# Altium PCB RoomSensor.PcbDoc
Units mm, origin at the board's own origin, x right, y up, seen from the top; angles counter-clockwise.
Board outline 11.82 x 18.92 mm, 2 copper layers (Top Layer, Bottom Layer); 9 components, 6 nets, 52 pads, 29 vias.
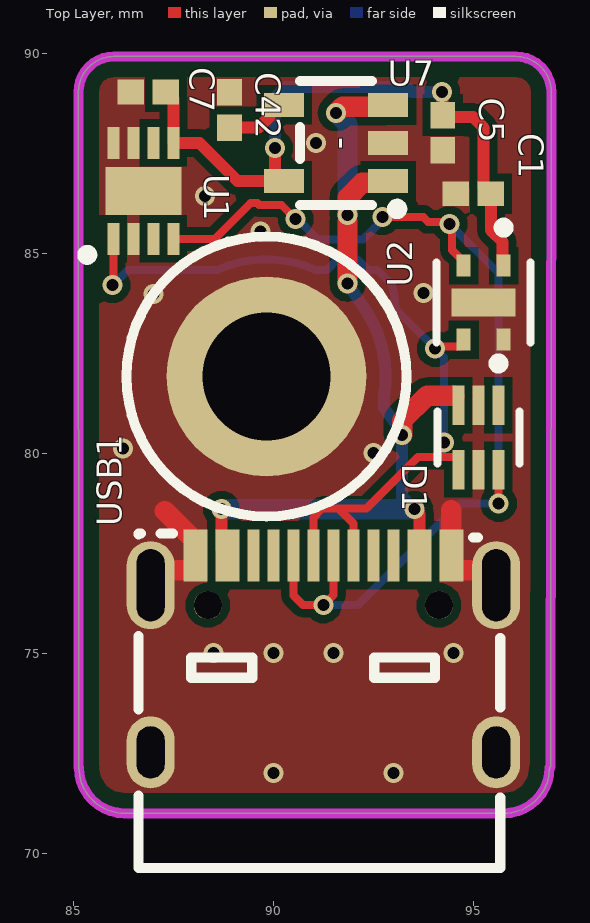
[diagram p0: Top Layer view]
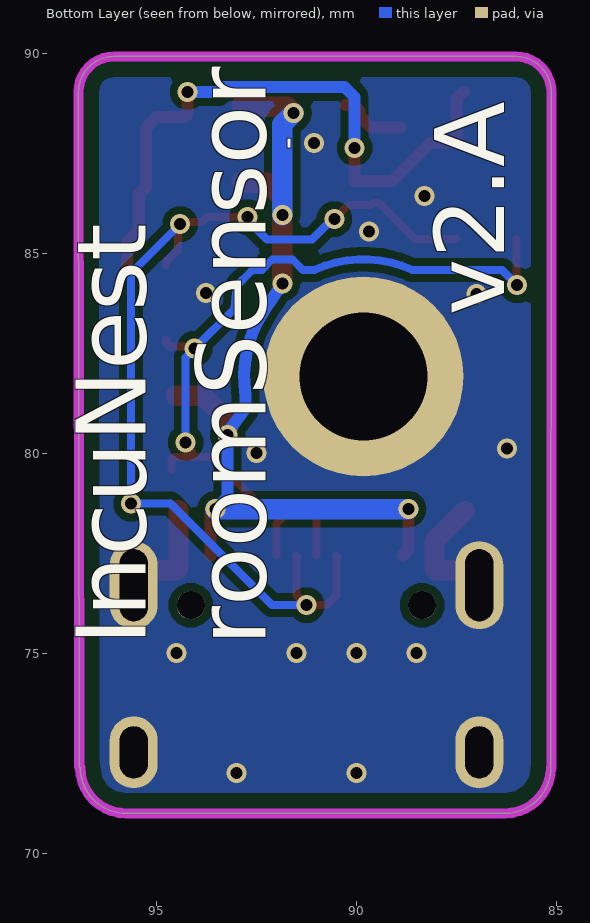
[diagram p1: Bottom Layer view, seen from below]
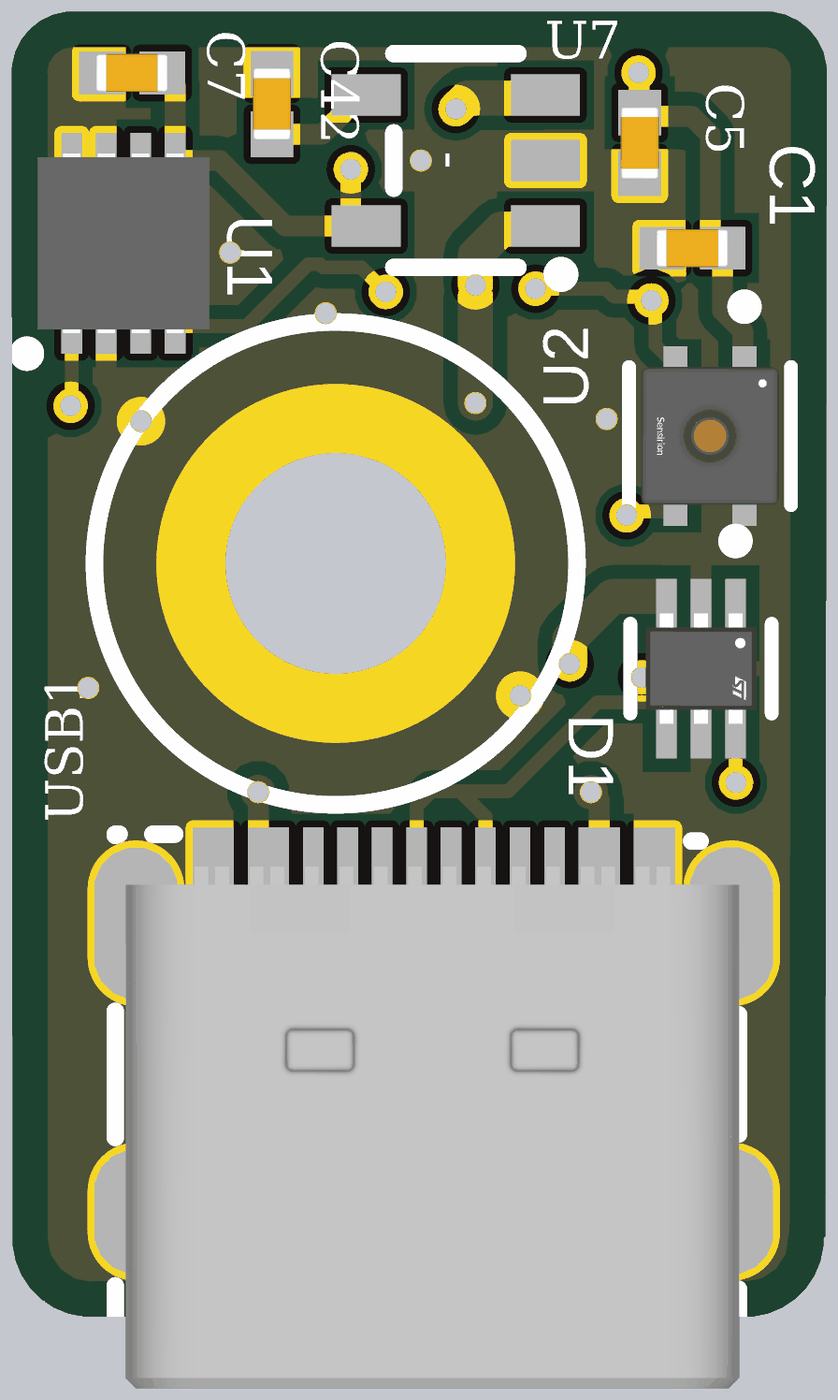
[diagram p2: 3D render of the assembled board from above, using the file's embedded part models]

## Layer stack, top to bottom
Top Solder: solder mask 0.0102, Solder Resist, Dk 3.5
Top Layer: signal copper 0.0356
Dielectric 1: dielectric 0.32, FR-4, Dk 4.8
Bottom Layer: signal copper 0.0356
Bottom Solder: solder mask 0.0102, Solder Resist, Dk 3.5

## Board outline
85.136,72.138 ccw(c86.279,72.138) 86.279,70.995 95.76,70.995 ccw(c95.76,72.138) 96.903,72.138 96.926,72.16 96.946,89.029 ccw(c96.059,89.029) 96.059,89.916 86.013,89.916 ccw(c86.013,89.029) 85.125,89.029

## Design rules (kind name [scope] priority, off if disabled: settings)
AssemblyTestPointUsage AssemblyTestPointUsage_1 [All] p2:
AssemblyTestpoint AssemblyTestpoint_1 [All] p2: testpointundercomponent=TRUE minsize=1.016 maxsize=2.54 preferedsize=1.524 minholesize=0 maxholesize=1.016 preferedholesize=0.813 testpointgrid=0.025 usegrid=TRUE gridtolerance=0 allowsidetop=TRUE allowsidebottom=TRUE
Clearance "Board outline clearance" [All vs OnLayer('Keep-Out Layer')] p1: gap=0.381 ignorepadtopadclearanceinfootprint=FALSE except(0: Arc-Hole Track-Hole SMDPad-Hole THPad-Hole Via-Hole Fill-Hole Poly-Hole Region-Hole Text-Hole)
Clearance Clearance_1 [All] p2: gap=0.2 ignorepadtopadclearanceinfootprint=FALSE except(0: Arc-Hole Track-Hole SMDPad-Hole THPad-Hole Via-Hole Fill-Hole Poly-Hole Region-Hole Text-Hole; 0.17: SMDPad-SMDPad; 0.254: Track-Via; 0.33: Track-THPad)
ComponentClearance [InComponent('L1')] p1: gap=0 collisioncheckmode=3 verticalgap=0.254 showdistances=FALSE
ComponentClearance UFL [InComponent('RF_CON1')] p2: gap=0 collisioncheckmode=3 verticalgap=0.254 showdistances=FALSE
ComponentClearance ComponentClearance_1 [All] p3: gap=0.254 collisioncheckmode=3 verticalgap=0.254 showdistances=FALSE
DiffPairsRouting [All] p1: maxlimit=0.254 minlimit=0.203 mostfreqgap=0.254 toplayer_minwidth=0.203 toplayer_maxwidth=0.381 toplayer_prefwidth=0.381 bottomlayer_minwidth=0.203 bottomlayer_maxwidth=0.381 bottomlayer_prefwidth=0.381 maxuncoupledlength=12.7
DiffPairsRouting DiffPairsRouting_1 [All] p2: maxlimit=0.254 minlimit=0.254 mostfreqgap=0.254 toplayer_minwidth=0.381 toplayer_maxwidth=0.381 toplayer_prefwidth=0.381 bottomlayer_minwidth=0.381 bottomlayer_maxwidth=0.381 bottomlayer_prefwidth=0.381 maxuncoupledlength=12.7
FabricationTestPointUsage FabricationTestPointUsage_1 [All] p2: valid=0 allowmultiple=FALSE
FabricationTestpoint FabricationTestpoint_1 [All] p2: side=3 testpointundercomponent=TRUE minsize=1.016 maxsize=2.54 preferedsize=1.524 minholesize=0 maxholesize=1.016 preferedholesize=0.813 testpointgrid=0.025 allowsidetop=TRUE allowsidebottom=TRUE usegrid=TRUE gridtolerance=0
FanoutControl Fanout_LCC [IsLCC] p1: bgadir=Out bgaviamode=Centered fanoutstyle=Auto fanoutdirection=Alternating viagrid=0.025 // Fanout_LCC (Default Rule)
FanoutControl Fanout_BGA [IsBGA] p2: bgadir=Out bgaviamode=Centered fanoutstyle=Auto fanoutdirection=Alternating viagrid=0.025 // Fanout_BGA (Default Rule)
FanoutControl Fanout_Small [(CompPinCount < 5)] p3: bgadir=Out bgaviamode=Centered fanoutstyle=Auto fanoutdirection=OutThenIn viagrid=0.025 // Fanout_Small (Default Rule)
FanoutControl Fanout_SOIC [IsSOIC] p4: bgadir=Out bgaviamode=Centered fanoutstyle=Auto fanoutdirection=Alternating viagrid=0.025 // Fanout_SOIC (Default Rule)
FanoutControl Fanout_BGA_1 [IsBGA] p6: bgadir=Out bgaviamode=Centered fanoutstyle=Auto fanoutdirection=Alternating viagrid=0.025 // Fanout_BGA (Default Rule)
FanoutControl Fanout_LCC_1 [IsLCC] p7: bgadir=Out bgaviamode=Centered fanoutstyle=Auto fanoutdirection=Alternating viagrid=0.025 // Fanout_LCC (Default Rule)
FanoutControl Fanout_SOIC_1 [IsSOIC] p8: bgadir=Out bgaviamode=Centered fanoutstyle=Auto fanoutdirection=Alternating viagrid=0.025 // Fanout_SOIC (Default Rule)
FanoutControl Fanout_Small_1 [(CompPinCount < 5)] p9: bgadir=Out bgaviamode=Centered fanoutstyle=Auto fanoutdirection=OutThenIn viagrid=0.025 // Fanout_Small (Default Rule)
FanoutControl Fanout_Default_1 [All] p10: bgadir=Out bgaviamode=Centered fanoutstyle=Auto fanoutdirection=Alternating viagrid=0.025 // Fanout_Default (Default Rule)
Height Height_1 [All] p1: minheight=0 maxheight=50 prefheight=12.7
HoleSize HoleSize_1 [All] p1: absolutevalues=TRUE maxlimit=15 minlimit=0.2 maxpercent=80.000 minpercent=20.000
HoleToHoleClearance u8 [All vs InComponent('u8_1')] p1: gap=0 allowstackedmicrovias=TRUE
HoleToHoleClearance [All] p2: gap=0.254 allowstackedmicrovias=TRUE
LayerPairs LayerPairs_1 [All] p1: enforce=TRUE
MinimumAnnularRing [All] p1: minimumring=0.1
MinimumSolderMaskSliver MinimumSolderMaskSliver_1 [All] p1 off: minsoldermaskwidth=0.2
NetAntennae NetAntennae_1 [All] p2: netantennaetolerance=0
PasteMaskExpansion PasteMaskExpansion_1 [All] p2: expansion=0
PlaneClearance PlaneClearance_1 [All] p1: clearance=0.508
PlaneConnect PlaneConnect_1 [All] p1: planeconnectstyle=Direct reliefexpansion=0.508 reliefentries=4 reliefconductorwidth=0.7 reliefairgap=0.254
PolygonConnect [All] p1: connectstyle=Direct reliefconductorwidth=0.508 reliefentries=4 polygonreliefangle="90 Angle" airgapwidth=0.254
RoutingCorners RoutingCorners_1 [All] p2: cornerstyle=45-Degree minsetback=2.54 maxsetback=2.54
RoutingLayers RoutingLayers_1 [All] p2: top layer_v5=TRUE bottom layer_v5=TRUE
RoutingPriority RoutingPriority_1 [All] p2: routingpriority=0
RoutingTopology RoutingTopology_1 [All] p2: topology=Shortest
RoutingVias RoutingVias_1 [All] p1: holewidth=0.3 width=0.5 viastyle="Through Hole" minholewidth=0.2 minwidth=0.4 maxholewidth=0.711 maxwidth=1.27
ShortCircuit ShortCircuit_Antenna [InNet('NetC10_2')] p1: allowed=TRUE
ShortCircuit ShortCircuit_1 [All] p2: allowed=FALSE
SilkToSilkClearance SilkToSilkClearance_1 [All] p1: silktosilkclearance=0
SilkToSolderMaskClearance SilkToSolderMaskClearance_1 [IsPad] p1: minsilkscreentomaskgap=0 clearancetoexposedcopper=TRUE
SolderMaskExpansion [All] p1: expansion=0.102 istentingtop=FALSE
SolderMaskExpansion SolderMaskExpansion_1 [All] p2: expansion=0.102 istentingtop=FALSE
UnRoutedNet UnRoutedNet_1 [All] p1:
UnpouredPolygon UnpouredPolygon_1 [All] p2:
Width Width_GSM_ANTENNA_1 [InNet('NetC10_2')] p1: maxlimit=0.35 minlimit=0.35 preferedwidth=0.35
Width Width_GSM_ANTENNA_2 [InNet('NetC9_2')] p2: maxlimit=0.35 minlimit=0.35 preferedwidth=0.35
Width Width_1 [All] p3: maxlimit=8 minlimit=0.1 preferedwidth=0.2
13 further rules are at their usual default settings.

## Components (designator, comment, footprint, x,y, rotation, side; value= is the part's Value field where it differs from the comment)
C1 "100nF 0402 X7R 50V" CAPC1005X55X25NL5T10 94.996,86.487 r0 top
C5 "100nF 0402 X7R 50V" CAPC1005X55X25NL5T10 94.234,88.011 r90 top
C7 "1uF 0402 X5R 25V" CAPC1005X55X25NL5T10 86.868,89.027 r0 top
C42 "1uF 0402 X5R 25V" CAPC1005X55X25NL5T10 88.9,88.578 r270 top
D1 "ESDALC6V1P6" FP-SOT-666IP-MFG 95.123,80.391 r270 top value=7.5pF
U1 "STS35-DIS" SON50P250X250X100-9N-D 86.745,86.557 r90 top
U2 "SHTC3" FP-SHTC3-MFG 95.254,83.763 r270 top
U7 "SPX3819M5-L-3-3/TR" SOT-23-5_L3.0-W1.7-P0.95-LS2.8-BR 91.567,87.757 r0 top
USB1 "XKB U262-16XN-4BVC11" U262-161N-4BVC11 91.247,74.98 r0 top

## Footprints (in the part's own frame and the unit in brackets; to place one, negate y for a bottom-side part, rotate by r counter-clockwise, add the part's x,y. Pads: shape width x height; smd on the part's side, far side on the other; paste and mask are expansions set on the pad)
CAPC1005X55X25NL5T10 [mm] "Chip Capacitor, 2-Leads, Body 1.05x0.55mm, IPC Medium Density"
  rect 0.66x0.62 smd: 1(-0.44,0) 2(0.44,0)
  body extent -0.53,-0.28 0.53,0.28, height 0.55
FP-SHTC3-MFG [mm]
  rect 0.55x0.35 smd paste-1000 mask-1000: 1(-0.925,0.5) 2(-0.925,-0.5) 3(0.925,-0.5) 4(0.925,0.5)
  rect 0.7x1.6 smd paste-1000 mask+0: 5(0,0)
  silkscreen extent -2,-1.17 1,1.17, body extent -1.4,-1.1 1.4,1.1, height 0.25
FP-SOT-666IP-MFG [mm]
  rect 0.99x0.3 smd paste+0 mask+0: 1(-0.805,0.5) 2(-0.805,0) 3(-0.805,-0.5) 4(0.805,-0.5) 5(0.805,0) 6(0.805,0.5)
  silkscreen extent -1.97,-1.02 0.65,1.02, body extent -1.4,-0.95 1.4,0.95, height 0.25
SON50P250X250X100-9N-D [mm]
  rect 0.8x0.3 smd: 1(-1.2,0.75) 2(-1.2,0.25) 3(-1.2,-0.25) 4(-1.2,-0.75) 5(1.2,-0.75) 6(1.2,-0.25) 7(1.2,0.25) 8(1.2,0.75)
  rect 1.2x1.9 smd: 9(0,0)
  silkscreen extent -1.72,1.27 -1.48,1.52, body extent -1.3,-1.25 1.3,1.25, height 1
SOT-23-5_L3.0-W1.7-P0.95-LS2.8-BR [mm]
  rect 1x0.6 smd: 1(1.3,-0.95) 2(1.3,0) 3(1.3,0.95) 4(-1.3,0.95) 5(-1.3,-0.95)
  silkscreen extent -0.9,-1.78 1.65,1.55
U262-161N-4BVC11 [mm]
  rect 0.6x1.3 smd: A1B12(-3.2,2.461) A4B9(-2.4,2.461) B1A12(3.2,2.461) B4A9(2.4,2.461)
  rect 0.3x1.3 smd: A5(-1.25,2.461) A6(-0.25,2.461) A7(0.25,2.461) A8(1.25,2.461) B5(1.75,2.461) B6(0.75,2.461) B7(-0.75,2.461) B8(-1.75,2.461)
  oval 1.2x1.8 hole 0.7 slot 1.3 at 90 deg: SHELL(-4.32,-2.461) SHELL(4.32,-2.461)
  oval 1.2x2.2 hole 0.7 slot 1.8 at 90 deg: SHELL(-4.32,1.719) SHELL(4.32,1.719)
  round 0.7 hole 0.7 unplated: ""(-2.89,1.219) ""(2.89,1.219)
  silkscreen extent -4.62,-5.35 4.42,3.01, body extent -4.47,-5.02 4.43,2.54, height 3.3

## Part data
C1 C5: library part CMP-1662-00020-1, LCSC_PN=C77020, ComponentLink1Description="Manufacturer URL", ComponentLink1URL=http://www.murata.com/, ComponentLink2Description=Datasheet, ComponentLink2URL=http://psearch.en.murata.com/capacitor/product/GRM155R60J105KE19%23.pdf
C7 C42: library part CMP-1662-00020-1, LCSC_PN=C77009, ComponentLink1Description="Manufacturer URL", ComponentLink1URL=http://www.murata.com/, ComponentLink2Description=Datasheet, ComponentLink2URL=http://psearch.en.murata.com/capacitor/product/GRM155R60J105KE19%23.pdf
D1: library part CMP-12225-000016-1, "TVS DIODE 3V SOT666IP", Breakdown Voltage=6.1V, Capacitance=7.5pF, LCSC_PN=C1976562, Manufacturer=STMicroelectronics, Max Junction Temp=+150°C, Package=SOT-666IP, Peak Pulse Power=30W, Reverse Standoff Voltage=3V, Temperature="-40°C to +150°C", Temperature Range Low=-40°C, Automotive=No, Category=Diode, ComponentLink2Description=Datasheet, ComponentLink2URL=https://www.st.com/resource/en/datasheet/esdalc6v1px.pdf, Device Class L1="Circuit Protection", Device Class L2="TVS Diodes", Device Class L3=unset, Digikey Description="TVS DIODE 3V SOT666IP", Direction=Unidirectional, Height=0.62mm, Lead Free=Yes, Manufacturer Part Number=ESDALC6V1P6, Mouser Description="ESDALC Series 4 Channel 6.1V Uni-Directional Transil? ESD Protection - SOT-666IP", Number Of Channels=4, Octopart=https://octopart.com/esdalc6v1p6-stmicroelectronics-347727, RoHS=TRUE, Temperature Range High=+150°C
U1: "Integrated Circuit", LCSC_PN=C5439927, Manufacturer_Name=Sensirion, Mouser Part Number=403-STS35-DIS, Datasheet Link=https://componentsearchengine.com/Datasheets/1/STS35-DIS.pdf, Height=1mm, Manufacturer_Part_Number=STS35-DIS, Mouser Price/Stock=https://www.mouser.co.uk/ProductDetail/Sensirion/STS35-DIS?qs=F5EMLAvA7IBgq10iVaCNnw%3D%3D
U2: library part CMP-144040-000003-1, "SENSOR HUMI/TEMP I2C 2% SMD", Manufacturer=Sensirion, Max Supply Voltage=3.6V, Min Supply Voltage=1.62V, Operating Supply Current=0.3-900uA, Package=0, Temperature="-40°C to +125°C", Temperature Range High=+125°C, Temperature Range Low=-40°C, Accuracy=2%, Automotive=No, Category=IC, ComponentLink2Description=Datasheet, ComponentLink2URL=https://www.sensirion.com/fileadmin/user_upload/customers/sensirion/Dokumente/0_Datasheets/Humidity/Sensirion_Humidity_Sensors_SHTC3_Datasheet.pdf, Device Class L1=Sensors, Device Class L2="Temperature and Humidity Sensors", Device Class L3=unset, Digikey Description="SENSOR HUMI/TEMP I2C 2% SMD", Height=0.75mm, Interface=I2C, Ipc Land Pattern Name=DFN200X200X75-4, Lead Free=Yes, Manufacturer Part Number=SHTC3, Mouser Description="SHTC3 Series 0 to 100% RH 3.6 V Humidity and Temperature Sensor IC - DFN-4", Octopart=https://octopart.com/shtc3-sensirion-91912225, Resolution=16bits, RoHS=TRUE, Sensor Output=I2C
U7: BOM_JLCPCB Part Class="Extended Part", BOM_Manufacturer=EXAR, LCSC_PN=C9055, BOM_Manufacturer Part=SPX3819M5-L-3-3/TR, BOM_Supplier=LCSC, BOM_Supplier Part=C9055, spicePre=U, spiceSymbolName=SPX3819M5-L-3-3/TR
USB1: BOM_JLCPCB Part Class="Extended Part", BOM_Manufacturer="XKB Enterprise", BOM_Manufacturer Part=U262-16XN-4BVC11, LCSC_PN=C319148, BOM_Supplier=LCSC, BOM_Supplier Part=C319148, Contributor=LCSC

## Free pads (board coordinates)
  round 5 hole 3.2: 0(89.824,81.917)

## Via types
v1: diameter 0.5, hole 0.3, Top Layer to Bottom Layer, 20 vias
v2: diameter 0.5, hole 0.3, Top Layer to Bottom Layer, tented both sides, 9 vias

## Nets (pads, with @x,y where several pads share a name; then routed paths per layer and width w, separated by ;. In a path a pad name is that pad's centre, name@x,y a point inside that pad or via, vN(x,y) a via of type N, cw(c..) or ccw(c..) an arc to the next point about the centre after c; other vN are vias at no path point)
3v3_RS@100mA: C1.2 C5.2 C7.2 U1.5 U2.1 U7.5 | length 16.1
  Top Layer w0.3: C7.2 87.328,89.027 87.495,88.86 U1.5 88.146,87.757 89.096,86.807 90.043,86.807 v1(90.043,87.63) ; v1(94.217,89.031) 94.225,89.022 94.225,88.46 C5.2 94.287,88.398 94.99,88.398 95.256,88.132 95.256,87.249 95.256,86.647 95.416,86.487 C1.2 95.436,85.576 95.729,85.283 95.729,84.713 U2.1
  Bottom Layer w0.3: v1(90.043,87.63) 90.043,88.9 90.301,89.158 93.328,89.158 93.455,89.031 v1(94.217,89.031)
DGND: C1.1 C5.1 C7.1 C42.1 D1.2 D1.5 pad.0 U1.2 U1.7 U1.8 U1.9 U2.4 U2.5 U7.2 USB1.A1B12 USB1.B1A12 USB1.SHELL | length 5.9
  Top Layer w0.508: USB1.SHELL@86.927,76.698 86.927,76.75 87.247,77.07 88.001,77.07 88.047,77.116 USB1.A1B12 88.047,77.791 87.284,78.554 ; 94.447,78.573 USB1.B1A12 94.447,77.116 94.493,77.07 95.247,77.07 95.567,76.75 USB1.SHELL@95.567,76.698
  other v1: 90,72 93,72 88.5,75 90,75 91.5,75 94.5,75 92.5,80 87,83.978
  other v2: 86.235,80.112 93.754,84.009 89.679,85.542 88.293,86.422 91.059,87.757
ENV_SENS_SCL: D1.6 U1.4 U2.2 USB1.A7 USB1.B7 | length 26.1
  Top Layer w0.2: U1.4 88.532,85.357 89.43,86.255 89.595,86.255 89.643,86.207 90.196,86.207 v1(90.551,85.852) ; USB1.B7 90.497,76.442 90.737,76.202 v2(91.245,76.202) 91.497,76.453 USB1.A7 ; v1(92.722,85.899) 93.749,85.899 93.864,85.784 94.346,85.784 v1(94.403,85.727) ; v1@94.452,85.727 94.461,85.718 94.461,85.081 94.754,84.788 U2.2 ; D1.6 95.623,78.748 v1(95.631,78.74)
  Bottom Layer w0.2: v1(90.551,85.852) 90.598,85.852 91.106,85.344 92.235,85.344 92.722,85.831 v1(92.722,85.899) ; v2(91.245,76.202) 92.11,76.202 94.649,78.74 v1(95.631,78.74) 95.631,84.499 v1(94.403,85.727)
ENV_SENS_SDA: D1.4 U1.1 U2.3 USB1.A6 USB1.B6 | length 21
  Top Layer w0.2: v1(85.979,84.201) 85.979,84.328 85.995,84.344 U1.1 ; USB1.A6 90.997,78.391 91.221,78.615 91.626,78.615 ; 91.997,78.243 91.626,78.615 ; v1(94.043,82.614) 94.101,82.671 94.679,82.671 94.754,82.746 U2.3 ; 94.107,80.025 94.107,79.915 94.094,79.902 ; D1.4 94.623,79.852 94.573,79.902 94.094,79.902 ; 91.626,78.615 92.328,78.615 93.616,79.902 94.094,79.902
  Top Layer w0.203: USB1.B6 91.997,78.243
  Bottom Layer w0.2: v1(85.979,84.201) 86.36,84.582 88.608,84.582 cw(c89.824,81.917) 91.041,84.582 91.338,84.582 91.601,84.845 92.101,84.845 92.364,84.582 92.592,84.582 92.651,84.523 92.969,84.206 cw(c90.077,83.529) 93.046,83.611 v1(94.043,82.614) 94.265,82.392 v1(94.265,80.264)
NetC42_2: C42.2 U7.4 | length 1.7
  Top Layer w0.3: C42.2 89.626,88.138 89.917,88.429 89.917,88.557 90.067,88.707 U7.4
VUSB: D1.3 U7.1 U7.3 USB1.A4B9 USB1.B4A9 | length 22.6
  Top Layer w0.305: v2(88.7,78.6) 88.699,78.347 88.7,77.589 USB1.A4B9 ; v2(93.526,78.6) 93.647,78.478 USB1.B4A9
  Top Layer w0.508: v1(91.567,88.504) 91.724,88.661 92.821,88.661 U7.3 ; v2(91.851,84.241) v1@91.851,85.791 ; v1(91.851,85.948) 91.851,86.39 92.222,86.761 92.821,86.761 U7.1 ; v1(93.218,80.457) 93.218,80.817 93.838,81.437 D1.3@94.519,81.437
  Bottom Layer w0.3: v2(91.851,84.241) 92.295,83.583 cw(c89.824,81.917) 92.333,83.525 cw(c89.824,81.917) 92.767,81.444 92.767,81.126 92.831,81.039 93.218,80.511 93.218,78.908 v2(93.526,78.6)
  Bottom Layer w0.508: v2(88.7,78.6) v2(93.526,78.6) ; v1(91.567,88.504) 91.851,88.22 v1(91.851,85.948)
pads on no net: D1.1 U1.3 U1.6 USB1. USB1.A5 USB1.A8 USB1.B5 USB1.B8

## Polygon pours and split planes (outlines as drawn)
DGND on Top Layer "DGND_L01_P000" (solid, remove dead copper, pour order 0): 81.28,92.329 99.187,92.329 102.362,89.154 102.362,71.12 96.139,64.897 85.979,64.897 81.407,69.469
DGND on Bottom Layer "DGND_L02_P001" (solid, remove dead copper, pour order 1): 81.28,92.359 99.187,92.359 102.362,89.184 102.362,71.15 96.139,64.927 85.979,64.927 81.407,69.499

## Keep-outs
Keep-Out Layer:
  lines w0.254: 85.125,72.149 85.125,89.029 cw(c86.013,89.029) 86.013,89.916 88.309,89.916 93.763,89.916 96.059,89.916 cw(c96.059,89.029) 96.946,89.029 96.926,72.16 ; 85.136,72.138 ccw(c86.279,72.138) 86.279,70.995 95.76,70.995 ccw(c95.76,72.138) 96.903,72.138

## Silkscreen, mask and mechanical layers (free items; w line width, h text height)
Top Overlay:
  circle w0.254: c89.824,81.917 r3.5
  text "-" at 91.245,87.894 h1.07 r270
Bottom Overlay:
  text "-" at 91.245,87.894 h1.07 r270
  text "v2.A" at 85.725,83.439 h3 r270
  text "IncuNest / roomSensor" at 91.694,75.184 h3 r270